# Altium PCB AGC_Calib_Board.PcbDoc (part 2 of 2)
Units mil, origin at the board's own origin, x right, y up, seen from the top; angles counter-clockwise.
Board outline 3200 x 2800 mil, 6 copper layers (Top Layer, InternalPlane1, MidLayer1, MidLayer2, MidLayer3, Bottom Layer), stack 62.3 mil thick; 76 components, 86 nets, 398 pads, 234 vias.
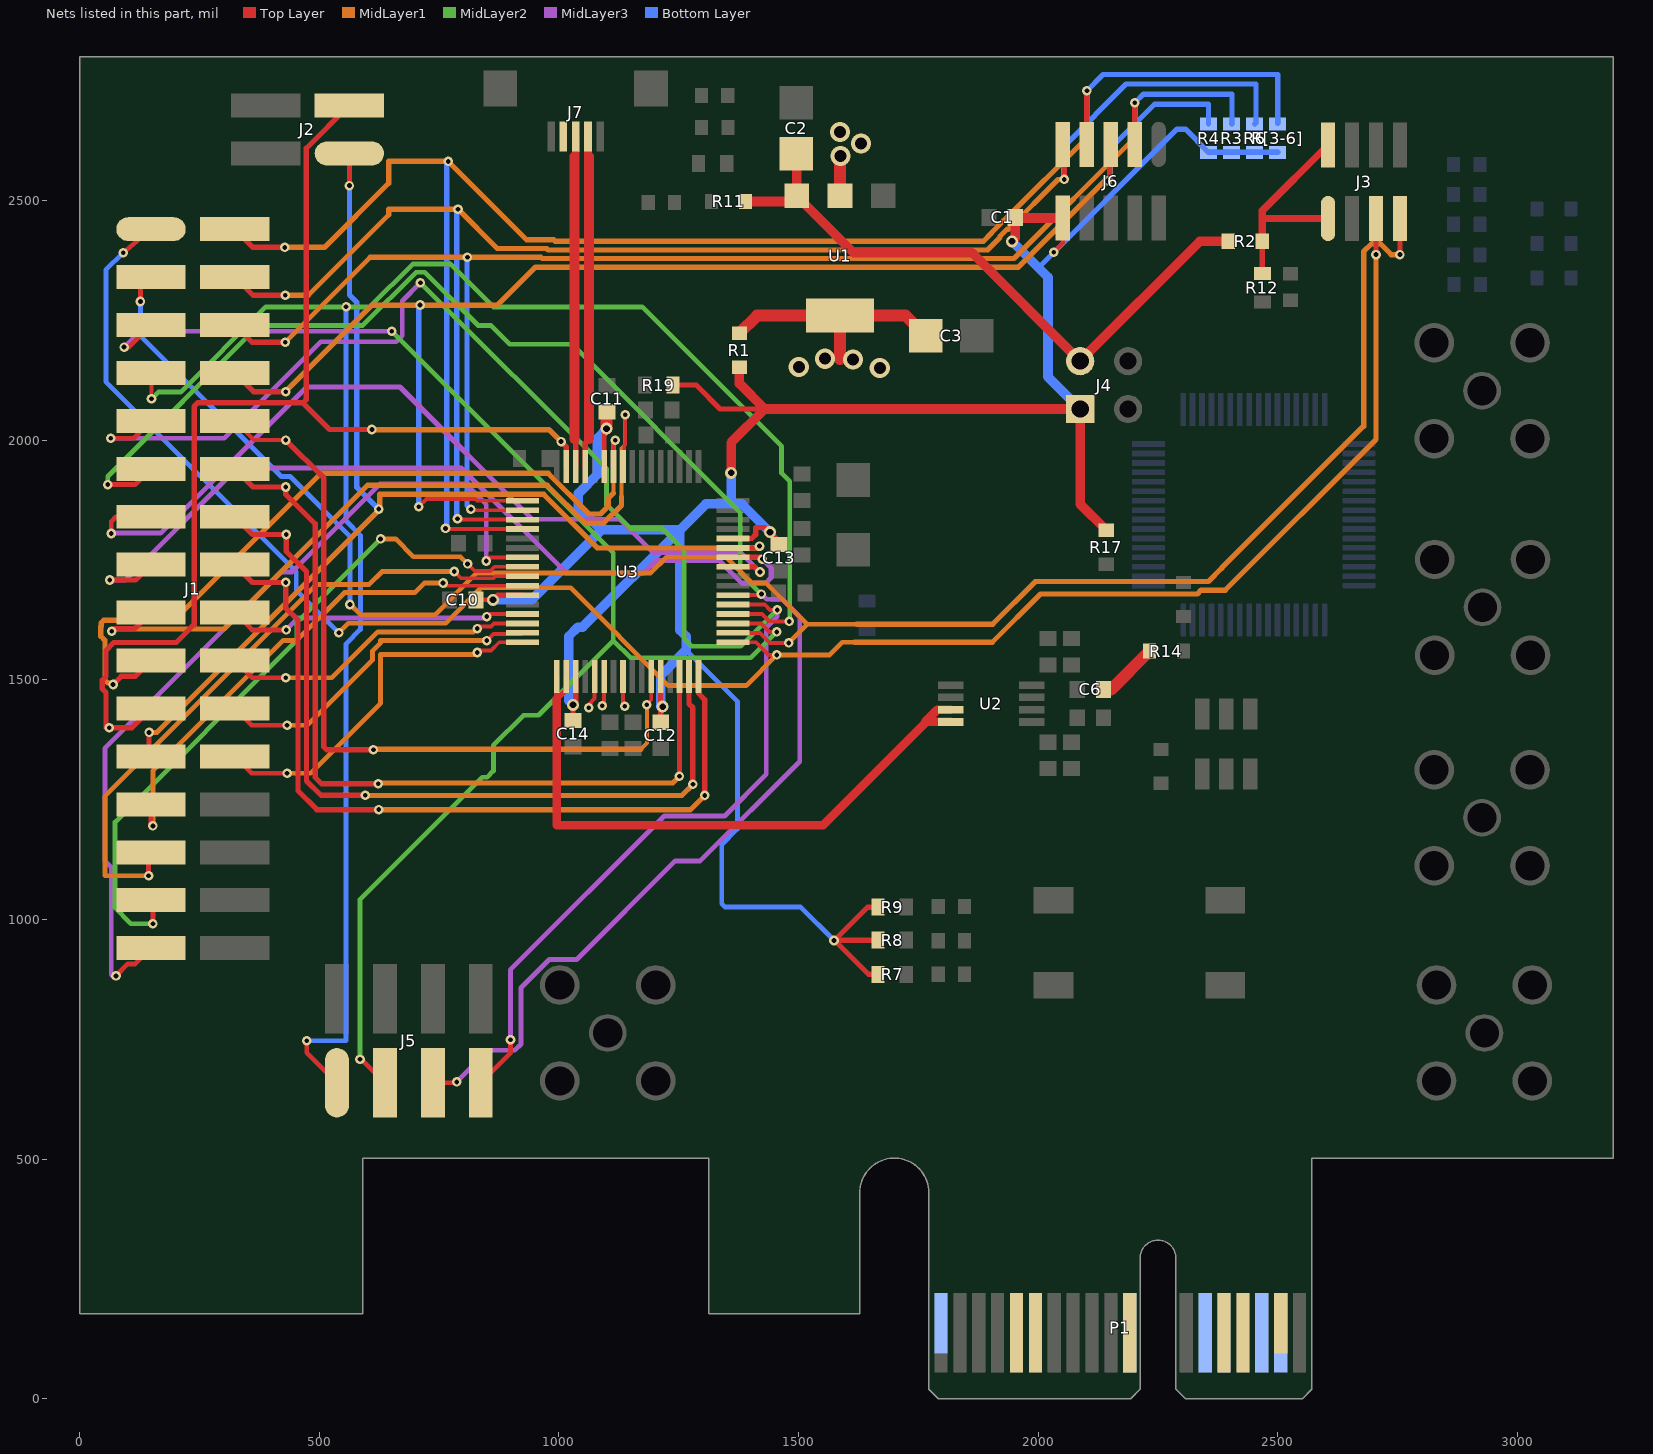
[diagram p6: the nets of this part, all layers, seen from the top]

## Via types
v1: diameter 20, hole 10, Top Layer to Bottom Layer, tented top, 130 vias
v2: diameter 20, hole 10, Top Layer to Bottom Layer, 48 vias
v3: diameter 42, hole 25, Top Layer to Bottom Layer, 29 vias
v4: diameter 25, hole 14, Top Layer to Bottom Layer, 19 vias
v5: diameter 200, hole 125, Top Layer to Bottom Layer, 4 vias
v6: diameter 20, hole 10, Top Layer to Bottom Layer, tented both sides, 3 vias
v7: diameter 25, hole 14, Top Layer to Bottom Layer, tented top, 1 vias

## Nets (pads, with @x,y where several pads share a name; then routed paths per layer and width w, separated by ;. In a path a pad name is that pad's centre, name@x,y a point inside that pad or via, vN(x,y) a via of type N, cw(c..) or ccw(c..) an arc to the next point about the centre after c; other vN are vias at no path point) (continued)
PA0: J1.1 J3.3 U3.17 | length 4149.7
  Top Layer w8: U3.17@1363,1578.09 1411.15,1578.09 1437.51,1551.73 v2(1454.51,1551.73)
  Top Layer w10: v1(91,2391) J1.1@149,2440
  Top Layer w11.1: v2(2704.71,2386.93) J3.3@2704.71,2462.2
  MidLayer1 w10: v1@540,1597 v1(541,1598) 560.72,1617.72 763.5,1617.72 837.5,1691.72 1024.5,1691.72 1228.5,1487.72 1390.5,1487.72 v2(1454.51,1551.73) 1565.14,1551.73 1591.5,1578.09 1617.51,1578.09
  MidLayer1 w11.1: 1617.51,1578.09 1904.09,1578.09 2005,1679 2332,1679 2339.9,1686.9 2390.19,1686.9 2704.71,2001.42 v2(2704.71,2386.93)
  Bottom Layer w10: v1(91,2391) 55,2355 55,2122 55.11,2122 452,1725.11 452,1687 v1(541,1598)
PA1: J1.2 J3.4 U3.18 | length 4000.2
  Top Layer w8: U3.18@1363,1597.78 1419.46,1597.78 1440.51,1576.73 v2(1479.51,1576.73)
  Top Layer w10: v1(127,2289) 127,2318 J1.2@149,2340
  Top Layer w11.1: v2(2754.71,2386.93) J3.4@2754.71,2462.2
  MidLayer1 w10: v1@563,1659 586.28,1635.72 742,1635.72 829,1722.72 1191.5,1722.72 1224.5,1755.72 1349.5,1755.72 1403.5,1701.72 1432.52,1701.72 1518.51,1615.73 ; v2(1479.51,1576.73) 1518.51,1615.73 ; 1621.32,1615.73 1518.51,1615.73
  MidLayer1 w11.1: 1621.32,1615.73 1904.87,1615.73 1994.13,1705 2355,1705 2383,1733 ; 2382.7,1732.82 2679,2029.12 2679,2393.11 2695.37,2409.48 2714.05,2409.48 2736.6,2386.93 v2(2754.71,2386.93)
  Bottom Layer w10: v1(127,2289) 127,2218 421,1924 439.11,1924 564,1799.11 v1(564,1657)
PA2: J1.3 J5.2 U3.19 | length 3151.1
  Top Layer w8: U3.19@1363,1617.46 1421.78,1617.46 1439.51,1599.73 v2(1454.51,1599.73)
  Top Layer w10: v1(93,2194) 103,2194 J1.3@149,2240 ; v1(585,708) 588,708 J5.2@637,659
  MidLayer3 w10: v1(93,2194) 126.11,2227.11 v1(651.11,2227.11)
  MidLayer2 w10: v1@585,707 v1(585,708) 585,1041.33 840.4,1296.73 850.62,1296.73 863.51,1309.62 863.51,1362.84 926.4,1425.73 957.51,1425.73 1113.5,1581.72 ; v1(651.11,2227.11) 1113.5,1764.72 1113.5,1581.72 ; v2(1454.51,1599.73) 1400.5,1545.72 1149.5,1545.72 1113.5,1581.72
PA3: J1.4 J5.1 U3.20 | length 3893.2
  Top Layer w8: J1.4@149,2140 150,2141 v1(150,2086) ; U3.20@1363,1637.15 1424.09,1637.15 1439.51,1621.73 v2(1480.51,1621.73)
  Top Layer w10: v1(474,747) 474,722 J5.1@537,659
  MidLayer2 w10: v1(150,2086) 164,2100 210.96,2100 388.68,2277.72 605.57,2277.72 694.96,2367.11 774.11,2367.11 863.5,2277.72 1173.5,2277.72 1464.5,1986.72 1464.5,1930.72 1481.5,1913.72 1481.5,1622.72 v2(1480.51,1621.73)
  Bottom Layer w10: v1(474,747) 556,747 556,1574.89 586,1604.89 586,1801.15 556,1831.15 v1(556,2278)
PA4: J1.5 J5.4 U3.21 | length 3576.5
  Top Layer w8: U3.21@1363,1656.83 1429.41,1656.83 1440.51,1645.73 v2(1455.51,1645.73)
  Top Layer w10: v1(65,2004) 113,2004 J1.5@149,2040 ; J5.4@837,659 899,721 v1(899,749)
  MidLayer3 w10: v1(65,2004) 301.89,2004 503,2205.11 660.23,2205.11 673.11,2218 673.11,2290.11 v1(711.11,2328.11) ; v1(899,749) 899,895 1219.73,1215.73 1345.62,1215.73 1432.51,1302.62 1432.51,1608.84 1455.51,1631.84 v2(1455.51,1645.73)
  MidLayer2 w10: v1(711.11,2328.11) 1099.5,1939.72 1099.5,1864.72 1148.5,1815.72 1214.5,1815.72 1261.5,1768.72 1261.5,1585.72 1277.5,1569.72 1379.5,1569.72 v2(1455.51,1645.73)
PA5: J1.6 J5.3 U3.22 | length 3586.8
  Top Layer w8: U3.22@1363,1676.52 v1@1420.3,1676.52
  Top Layer w10: v1(59,1907) 116,1907 J1.6@149,1940 ; J5.3@737,659 785,659 v1(787,661)
  Top Layer w11.1: v1@1420.3,1676.52 v1(1422.51,1678.73)
  MidLayer3 w10: v1(787,661) 853,727 908.11,727 921,739.89 921,847.43 ; 921,847 921,857.43 979.91,916.34 1037.34,916.34 1243,1122 1295.11,1122 1502.51,1329.4 1502.51,1630.84 1465.62,1667.73 1433.51,1667.73 v1(1422.51,1678.73)
  MidLayer2 w10: v1(59,1907) 59,1924 374.11,2239.11 591,2239.11 702,2350.11 720.23,2350.11 831.23,2239.11 858.11,2239.11 897.5,2199.72 1027.5,2199.72 1378.5,1848.72 1378.5,1722.74 v1(1422.51,1678.73)
PA6: J1.7 U3.25 | length 1814.2
  Top Layer w10: v1@65,1806 v1(66,1805) 66,1830 76,1840 J1.7@149,1840
  Top Layer w11.1: U3.25@1363,1735.57 1408.67,1735.57 v2(1419.51,1724.73)
  MidLayer3 w10: v1@66,1806 169,1806 473.72,2110.72 668.5,2110.72 944.5,1834.72 1126.5,1834.72 1195.5,1765.72 1378.52,1765.72 v2(1419.51,1724.73)
PA7: J1.8 U3.26 | length 1810.5
  Top Layer w10: v1(63,1708) 117,1708 J1.8@149,1740
  Top Layer w11.1: U3.26@1363,1755.26 1420.98,1755.26 v2(1424.51,1751.73)
  MidLayer3 w10: v1(63,1708) 95.04,1708 328.77,1941.72 796.55,1941.72 1015.55,1722.72 1177.5,1722.72 1203.5,1748.72 1334.5,1748.72 1381.5,1701.72 1431.5,1701.72 1442.5,1712.72 1442.5,1733.74 v2(1424.51,1751.73)
PB0: J1.9 U3.41 | length 1640.6
  Top Layer w8: U3.41@1133.67,1945.22 1136.45,1948 1136.45,1988.97 1138.51,1991.03 v2(1138.51,2052.73)
  Top Layer w11.1: v1(67,1601) 67,1600 74,1607 116,1607 J1.9@149,1640
  MidLayer1 w8: 1130.53,1881.75 1130.53,1983.06 1138.51,1991.03 v2(1138.51,2052.73)
  MidLayer1 w11.1: v1(67,1601) 67,1600 72.9,1605.9 301.01,1605.9 600.84,1905.73 975.51,1905.73 1054.51,1826.73 1093.51,1826.73 1130.51,1863.73 1130.51,1881.73
PB1: J1.10 U3.42 | length 1658.2
  Top Layer w8: U3.42@1113.98,1945.22 v2@1113.98,1996.2
  Top Layer w11.1: v1(70,1490) 87,1507 116,1507 J1.10@149,1540
  MidLayer1 w8: 1113.98,1889.2 v2@1113.98,1996.2
  MidLayer1 w11.1: v1@67,1493 59,1493 53,1499 53,1582.11 44.45,1590.66 44.45,1610.34 45,1610.89 45,1618.21 50.79,1624 197.1,1624 503.83,1930.73 977.51,1930.73 1062.51,1845.73 1086.51,1845.73 1103.51,1862.73 1103.51,1878.73 1113.98,1889.2
  other v2: 1117.51,1999.73
PB2: J1.11 J2.2 U3.47 | length 2458.5
  Top Layer w11.1: J1.11@149,1440 109,1400 55,1400 55,1473.11 47.45,1480.66 47.45,1499.34 55,1506.89 55,1561.19 71.36,1577.55 201.74,1577.55 239.01,1614.82 239.01,2070.2 246.36,2077.55 466.25,2077.55 ; J2.2@563,2698 562.46,2698 472.99,2608.54 472.99,2084.29 466.25,2077.55 ; v1(610,2022) 521.8,2022 466.25,2077.55 ; v2(1004.51,1996.73) 1015.56,1985.68 U3.47@1015.56,1945.22
  MidLayer1 w11.1: v1@610,2021.44 979.51,2021.73 v2(1004.51,1996.73)
  other v1: 62,1400
PB3: J1.12 J2.1 U3.27 | length 2437.3
  Top Layer w11.1: v1(145,1390) 145,1336 J1.12@149,1340 ; v1(563,2531) J2.1@563,2598 ; U3.27@1363,1774.94 1414.72,1774.94 v2(1418.51,1778.73)
  MidLayer1 w10: 1080.3,1774.94 1422.3,1774.94 v2(1418.51,1778.73)
  MidLayer1 w11.1: v1(145,1390) 161.07,1390 626,1854.93 626,1886.73 968.51,1886.73 1080.3,1774.94
  Bottom Layer w11.1: v1(563,2531) 563,2302.89 578.55,2287.34 578.55,1901.45 v1(624,1856)
PB4: J1.13 U3.58 | length 1091.6
  Top Layer w8: v1(758.51,1701.73) 764.04,1696.2 U3.58@924.02,1696.2
  Top Layer w10: v1@149,1199 J1.13@149,1240
  MidLayer1 w10: v1(153,1195) 153,1310 425,1582 453,1582 552.73,1681.73 699.51,1681.73 719.51,1701.73 v1(758.51,1701.73)
PB5: J1.14 U3.57 | length 1380.8
  Top Layer w8: v1(781.51,1725.73) 795.51,1711.73 863.42,1711.73 867.58,1715.89 U3.57@924.02,1715.89
  Top Layer w10: v1(144,1091) 144,1135 J1.14@149,1140
  MidLayer1 w10: v1(144,1091) 53,1091 53,1257.11 494.62,1698.73 604,1698.73 631,1725.73 v1(781.51,1725.73)
PB6: J1.15 U3.56 | length 1477.8
  Top Layer w8: v1(809.51,1741.73) 824.51,1726.73 857.21,1726.73 866.05,1735.57 U3.56@924.02,1735.57
  Top Layer w10: J1.15@149,1040 153,1044 v1(153,991)
  MidLayer2 w10: 72,1026 107,991 v1(153,991) ; 74,1027 74,1203 453,1582 453,1618.72 v1(628,1793.72)
  MidLayer1 w10: v1(628,1793.72) 659.5,1793.72 696.5,1756.72 794.52,1756.72 v1(809.51,1741.73)
PB7: J1.16 U3.55 | length 1824.2
  Top Layer w8: v1(848.51,1747.73) 856.04,1755.26 U3.55@924.02,1755.26
  Top Layer w10: v1(76,882) 101,907 116,907 J1.16@149,940
  MidLayer3 w10: v1(76,882) 69,882 66,885 66,1109.11 53,1122.11 53,1357.11 420.89,1725 443.28,1725 627,1908.72 805.5,1908.72 848.51,1865.72 v1(848.51,1747.73)
PC0: J1.17 J6.4 R[3-6].2 U3.52 | length 3701.4
  Top Layer w8: v2@764.93,1814.31 U3.52@924.02,1814.31
  Top Layer w11: J1.17@324,2440 362,2402 v1(428,2402) ; J6.4@2101.28,2616.81 2101.28,2688.5 2101.51,2688.73 v1(2101.51,2728.73)
  MidLayer1 w11: v1(428,2402) 511,2402 645,2536 645,2581.43 v1(769.21,2581.43) 932.91,2417.73 989.51,2417.73 992.51,2414.73 1885.51,2414.73 1902.51,2431.73 1902.51,2432.54 1927.7,2457.73 1928.51,2457.73 2101.51,2630.73 v1(2101.51,2728.73)
  Bottom Layer w11: v2@766.01,1818.23 766.01,2578.23 v1(769.21,2581.43) ; v1(2101.51,2728.73) 2135.51,2762.73 2499.51,2762.73 R[3-6].2@2499.51,2660.26
  other v2: 763.51,1815.73
PC1: J1.18 J6.5 R6.2 U3.51 | length 3387.5
  Top Layer w8: v2@790.24,1834 U3.51@924.02,1834
  Top Layer w11: J1.18@324,2340 362,2302 v1(429,2302) ; J6.5@2051.28,2616.81 2054.51,2613.57 v2(2054.51,2543.73)
  MidLayer1 w11: v1(429,2302) 477,2302 645,2470 645,2481.73 v2(789.51,2481.73) 871.51,2399.73 974.51,2399.73 977.51,2396.73 1894.51,2396.73 1920.51,2422.73 1920.51,2425.09 1935.16,2439.73 1937.51,2439.73 2041.51,2543.73 v2(2054.51,2543.73)
  Bottom Layer w8: v2@788.21,1836.03 v2(788.51,1835.73)
  Bottom Layer w11: v2@786.71,1837.53 786.71,2478.93 v2(789.51,2481.73) ; v2(2054.51,2543.73) 2054.51,2613.73 2183.51,2742.73 2454.51,2742.73 2454.51,2661.26 R6.2@2451.51,2659.26
PC2: J1.19 J6.2 R3.2 U3.50 | length 3142.2
  Top Layer w8: v2(816.51,1855.73) 818.56,1853.68 U3.50@924.02,1853.68
  Top Layer w11: J1.19@324,2240 360,2204 v1(429,2204) ; J6.2@2201.28,2616.81 2201.28,2687.5 2201.51,2687.73 v1(2201.51,2703.73)
  MidLayer1 w11: v1(429,2204) 606.43,2381.43 v2(809.21,2381.43) 962.81,2381.43 965.51,2378.73 1949.51,2378.73 2201.51,2630.73 v1(2201.51,2703.73)
  Bottom Layer w11: v2@808.51,2381.43 808.51,1863.73 v2(816.51,1855.73) ; v1(2201.51,2703.73) 2219.51,2721.73 2404.51,2721.73 2404.51,2660.26 R3.2@2403.51,2659.26
PC3: J1.20 J6.3 R4.2 U3.49 | length 3106.2
  Top Layer w8: v2(707.51,1860.73) 723.51,1876.73 825.21,1876.73 828.57,1873.37 U3.49@924.02,1873.37
  Top Layer w11: J1.20@324,2140 363,2101 v1(430,2101) ; v2(2144.51,2540.73) 2149.51,2545.73 2149.51,2615.05 J6.3@2151.28,2616.81
  MidLayer1 w11: v1(430,2101) 610.43,2281.43 872.21,2281.43 951.51,2360.73 1958.51,2360.73 2144.51,2546.73 v2(2144.51,2540.73)
  Bottom Layer w11: v2(707.51,1860.73) v2@707.51,2281.73 ; v2(2144.51,2540.73) 2149.51,2545.73 2149.51,2607.73 2242.51,2700.73 2354.51,2700.73 2355.51,2699.73 R4.2@2355.51,2659.26
  other v2: 710.51,2281.73
PC4: J1.21 U3.11 | length 1618.5
  Top Layer w8: J1.21@324,2040 364,2000 v1(430,2000) ; v2@1183.51,1448.92 1192.72,1458.13 U3.11@1192.72,1506.24
  Top Layer w11.1: v1(430,2000) 509.55,1920.45 509.55,1360 515.55,1354 v1(613,1354)
  MidLayer1 w8: 1170.51,1354.73 1183.51,1367.73 v2(1183.51,1447.73)
  MidLayer1 w11.1: v1@613,1354.73 1170.51,1354.73
PC5: J1.22 U3.14 | length 1731.3
  Top Layer w11: J1.22@324,1940 362,1902 v1(430,1902) 430,1887 491.5,1825.5 491.5,1296.46 504.96,1283 v1(623,1283) ; v2@1251.78,1299.05 U3.14@1251.78,1506.24
  MidLayer1 w11: v1@623,1284.73 1237.46,1284.73 v2(1251.46,1298.73)
PC6: J1.23 U3.15 | length 1709.3
  Top Layer w11: J1.23@324,1840 361,1803 v1(431,1803) 431,1768 473.5,1725.5 473.5,1289 503.5,1259 v1(596,1259) ; U3.15@1271.46,1506.24 1271.46,1449.73 1279.46,1441.73 v2@1279.46,1281.78
  MidLayer1 w11: v1@596.46,1258.54 1256.32,1258.54 v2(1279.51,1281.73)
PC7: J1.24 U3.16 | length 1700.6
  Top Layer w11: J1.24@324,1740 361,1703 v1(430,1703) 430,1650 455.5,1624.5 455.5,1268.5 495,1229 v1(624,1229) ; U3.16@1291.15,1506.24 1291.15,1471.73 1304.15,1458.73 v2@1304.15,1257.73
  MidLayer1 w10: v2@1298.51,1252.73 1304.51,1252.73 v2(1304.51,1258.73)
  MidLayer1 w11: v1@625,1228.84 1274.62,1228.84 v2@1298.51,1252.73
PD0: J1.25 U3.61 | length 628.7
  Top Layer w8: v1(849.51,1631.73) 854.93,1637.15 U3.61@924.02,1637.15
  Top Layer w10: J1.25@324,1640 360,1604 v1(431,1604)
  MidLayer3 w10: v1(431,1604) 455.73,1628.73 846.51,1628.73 v1(849.51,1631.73)
PD1: J1.26 U3.62 | length 661.9
  Top Layer w8: v1@833.51,1610.73 858.21,1610.73 864.94,1617.46 U3.62@924.02,1617.46
  Top Layer w10: J1.26@324,1540 360,1504 v1(430,1504) ; v1(829.51,1606.73) v1@833.51,1610.73
  MidLayer1 w10: v1(430,1504) 526.23,1504 621.95,1599.72 822.5,1599.72 v1(829.51,1606.73)
PD2: J1.27 U3.63 | length 708.3
  Top Layer w8: v1(849.51,1581.73) 863.51,1595.73 921.98,1595.73 U3.63@924.02,1597.78
  Top Layer w10: J1.27@324,1440 359,1405 v1(433,1405)
  MidLayer1 w10: v1(433,1405) 475,1405 611,1541 611,1559.77 628,1576.77 628,1581.73 v1(849.51,1581.73)
PD3: J1.28 U3.64 | length 787.2
  Top Layer w8: v1@833.51,1560.73 858.21,1560.73 875.57,1578.09 U3.64@924.02,1578.09
  Top Layer w10: J1.28@324,1340 359,1305 v1(433,1305) ; v1(829.51,1556.73) v1@833.51,1560.73
  MidLayer1 w10: v1(433,1305) 482,1305 628,1451 628,1552.73 825.51,1552.73 v1(829.51,1556.73)
PE0: U3.6 | length 62.1
  Top Layer w8: v2@1094.3,1449.52 U3.6@1094.3,1506.24
  Top Layer w10: v2(1090.51,1445.73) v2@1094.3,1449.52
PE1: U3.5 | length 69.5
  Top Layer w8: v2(1062.51,1441.73) 1062.51,1448.43 1074.61,1460.53 U3.5@1074.61,1506.24
PE3: U2.7 U2.8 U3.1 U3.2 | length 1337.6
  Top Layer w11.1: U3.1@995.87,1506.24 995.87,1460.09 1015.56,1479.78 U3.2@1015.56,1506.24
  Top Layer w17.79: 995.87,1460.09 995.87,1196.73 1551.51,1196.73 1764.39,1409.61 ; U2.8@1817.36,1412.17 1764.23,1412.17 1789.47,1437.41 U2.7@1817.71,1437.41
PE4: U3.8 | length 64.7
  Top Layer w8: U3.8@1133.67,1506.24 1133.67,1446.89 1136.54,1444.02 1136.85,1444.02 v2(1137.51,1444.73)
PER0_N: P1.A17
PER0_P: P1.A16
PERST#: P1.A11
PET0_N: P1.B15
PET0_P: P1.B14
PRSNT1#: P1.A1
PRSNT2#: P1.B17
REFCLK+: P1.A13
REFCLK-: P1.A14
RF_COUPLED_1: C6.2 R14.2 | length 112.9
  Top Layer w25: C6.2@2152.17,1479.73 R14.2@2232,1559.57
SMCLK: P1.B5
SMDAT: P1.B6
USB0D_N: J7.2 U3.45 | length 692.3
  Top Layer w11.1: U3.45@1054.93,1945.22 1054.93,1993.65 1063.01,2001.73
  Top Layer w15.75: J7.2@1060.72,2633.23 1060.72,2594.03 1063.01,2591.73
  Top Layer w20.5: 1063.01,2001.73 1063.01,2591.73
USB0D_P: J7.3 U3.46 | length 690.2
  Top Layer w11.1: 1032.51,2001.73 1035.24,1999 U3.46@1035.24,1945.22
  Top Layer w15.75: 1032.51,2591.73 1035.13,2594.35 J7.3@1035.13,2633.23
  Top Layer w20.5: 1032.51,2001.73 1032.51,2591.73
USBID_1: J7.4
VCC_33: C1.2 C10.2 C11.2 C12.2 C13.2 C14.2 J4.1 J6.10 R1.2 R3.1 R4.1 R6.1 R7.2 R8.2 R9.2 R17.1 R19.2 R[3-6].1 U3.3 U3.12 U3.28 U3.43 U3.59 | length 6296.8
  Top Layer w10: C10.2@827.07,1666.73 v4(862.51,1666.73) 872.3,1676.52 ; v2(2032.5,2391.72) 2051.28,2410.5 J6.10@2051.28,2463.27
  Top Layer w11: U3.43@1094.3,1945.22 v4@1094.3,2017.52 ; R19.2@1238.04,2114.73 1286.51,2114.73 1336.51,2064.73 1429.51,2064.73 ; R7.2@1665.74,885.51 1646.27,885.51 v1@1575.27,956.51 ; R8.2@1665.74,956.51 v1@1575.27,956.51 ; R9.2@1665.74,1025.51 1644.27,1025.51 v1@1575.27,956.51
  Top Layer w11.1: 872.3,1676.52 U3.59@924.02,1676.52 ; C14.2@1029.51,1415.29 v4(1029.51,1447.73) ; v4@1035.24,1453.46 U3.3@1035.24,1506.24 ; v4@1212.41,1443.83 U3.12@1212.41,1506.24 ; C12.2@1212.51,1411.29 1212.51,1443.73 v4(1216.51,1443.73) ; U3.28@1363,1794.63 1402.41,1794.63 1410.51,1802.73 1410.51,1817.73 1430.51,1817.73 v7(1440.51,1807.73) C13.2@1459.51,1788.73
  Top Layer w20: v4(1359.51,1931.73) 1359.51,1994.73 1429.51,2064.73 ; R1.2@1376.51,2151.87 1376.51,2117.73 1429.51,2064.73 ; v4(1945.51,2414.73) 1952.07,2421.29 C1.2@1952.07,2464.73 ; C1.2@1953.54,2463.27 J6.10@2051.28,2463.27 ; R17.1@2142,1812 2087.51,1866.49 J4.1@2087.51,2064.73 1429.51,2064.73
  Top Layer w25: v4(1099.51,2023.73) C11.2@1099.51,2057.17
  Bottom Layer w10: 1265.51,1561.73 1372.51,1454.73 1372.51,1188.69 1339.77,1155.95 1339.77,1032.7 1346.8,1025.67 1504.33,1025.67 v1(1574,956) ; 2003.51,2362.73 v2(2032.5,2391.72)
  Bottom Layer w11: 2003.51,2362.73 2289.51,2648.73 2306.98,2648.73 R4.1@2355.51,2600.2 R3.1@2403.51,2600.2 R6.1@2451.51,2600.2 R[3-6].1@2499.51,2600.2
  Bottom Layer w20: v4(862.51,1666.73) 942.51,1666.73 1088.51,1812.73 ; v4(1029.51,1447.73) 1020.51,1456.73 1020.51,1590.73 1039.51,1609.73 1049.51,1609.73 1252.51,1812.73 ; v4(1099.51,2023.73) 1100.51,2023.73 1080.51,2003.73 1080.51,1928.73 1040.51,1888.73 1040.51,1860.73 1088.51,1812.73 ; v4(1216.51,1443.73) 1212.51,1443.73 1212.51,1508.73 1265.51,1561.73 1265.51,1590.73 1252.51,1603.73 1252.51,1812.73 ; v4@1359.51,1919.73 1359.51,1866.73 ; v7(1440.51,1807.73) 1381.51,1866.73 1359.51,1866.73 ; v4(1945.51,2414.73) 2020.51,2339.73 2020.51,2131.73 J4.1@2087.51,2064.73 ; 1088.51,1812.73 1252.51,1812.73 ; 1252.51,1812.73 1306.51,1866.73 1359.51,1866.73
VCC_33P: C3.2 R1.1 U1.2 U1.4 | length 594.6
  Top Layer w25: R1.1@1376.51,2222.73 1413.51,2259.73 U1.4@1586.51,2259.73 ; 1586.51,2168.73 U1.4@1586.51,2259.73 ; U1.2@1586.51,2509.73 v3@1586.51,2591.73 ; C3.2@1765.36,2217.73 1723.36,2259.73 U1.4@1586.51,2259.73
  other v3: 1669.51,2150.73 1500.51,2152.73 1613.51,2167.73 1555.51,2169.73 1587.51,2592.73 1630.51,2618.73 1586.51,2642.73
VCC_50: C2.2 J4.2 R2.2 R11.2 U1.3 | length 1352.5
  Top Layer w10: U1.3@1483.96,2497.73 1495.96,2497.73 U1.3@1495.96,2509.73
  Top Layer w20: R11.2@1390.04,2497.73 U1.3@1483.96,2497.73 ; C2.2@1495.96,2597.13 U1.3@1495.96,2509.73 1614.96,2390.73 1861.51,2390.73 J4.2@2087.51,2164.73 2337.51,2414.73 R2.2@2396.65,2414.73
VCC_50_AUX_1: J3.1 J3.5 R2.1 R12.2 | length 462
  Top Layer w11: R12.2@2467.51,2347.26 R2.1@2467.51,2414.73
  Top Layer w15: R2.1@2467.51,2414.73 2467.51,2478.55 J3.5@2604.71,2615.75 ; 2468.04,2462.2 J3.1@2604.71,2462.2
WAKE#: P1.B11
pads on no net: J6.7 P1.B12 SW1.2 SW1.3 T1.5 TEST1.1 TEST1.2 TEST1.3 TEST1.4 TEST1.5 TEST1.6 TEST1.7 TEST1.8 TEST1.9 TEST1.10 TEST1.11 TEST1.12 TEST1.13 TEST1.14 TEST1.15 TEST1.16 TEST1.17 TEST1.18 TEST1.19 TEST1.20 TEST1.21 TEST1.22 TEST1.23 TEST1.24 TEST1.25 TEST1.26 TEST1.27 TEST1.28 TEST1.29 TEST1.30 TEST1.31 TEST1.32 TEST1.33 TEST1.34 TEST1.35 TEST1.36 TEST1.37 TEST1.38 TEST1.39 TEST1.40 TEST1.41 TEST1.42 TEST1.43 TEST1.44 TEST1.45 TEST1.46 TEST1.47 TEST1.48 TEST1.49 TEST1.50 TEST1.51 TEST1.52 TEST1.53 TEST1.54 TEST1.55 TEST1.56 TEST1.57 TEST1.58 TEST1.59 TEST1.60 TEST1.61 TEST1.62 TEST1.63 TEST1.64 TEST7.1 TEST7.2 TEST8.1 TEST8.2 TEST9.1 TEST9.2 TEST10.1 TEST10.2 TEST11.1 TEST11.2 TEST12.1 TEST12.2 TEST13.1 TEST13.2 TEST14.1 TEST14.2 U3.33 U3.35

## Polygon pours and split planes (outlines as drawn)
VCC_33P on Bottom Layer "Top Layer-No Net" (hatched 90Degree grid 20 track 10, pour order 10): 1495.51,2693.73 1679.51,2693.73 1685.51,2687.73 1684.51,2686.73 1684.51,2596.73 1684.51,2583.73 1649.51,2548.73 1618.51,2517.73 1618.51,2486.73 1548.51,2486.73 1547.51,2487.73 1532.51,2502.73 1532.51,2548.73 1530.51,2548.73 1495.51,2583.73 1495.51,2693.73
VCC_33P on Bottom Layer "Top Layer-No Net" (hatched 90Degree grid 20 track 10, pour order 12): 1429.51,2557.73 1429.51,2110.73 1427.51,2108.73 1730.51,2108.73 1730.51,2469.73 1727.51,2472.73 1621.51,2472.73 1621.51,2556.73 1622.51,2557.73
GND on Top Layer "Top Layer-No Net" (solid, pour order 33): 907.51,2132.73 912.51,2137.73 912.51,2620.73 1157.51,2620.73 1157.51,2134.73
GND on Top Layer "Top Layer-No Net" (solid, pour order 31): 647.51,2192.73 1358.28,2192.73 1493.11,2077.47 1814,2077.47 1814,1204.56 1726.2,1129.51 1711.57,1117 716.5,1117 713.36,1117 647.51,1173.29
GND on InternalPlane1 (split plane): 3179.9,522.1 2570.87,522.07 2568.93,521.87 2566.95,521.68 2566.94,521.68 2565.25,521.17 2563.18,520.54 2563.17,520.54 2562.06,519.94 2559.7,518.68 2558.75,517.9 2556.66,516.18 2556.65,516.18 2554.93,514.08 2554.16,513.13 2552.89,510.77 2552.3,509.66 2551.67,507.58 2551.16,505.89 2550.96,503.9 2550.77,501.97 2550.77,28.01 2542.86,20.1 2315.41,20.1 2307.5,28.01 2307.5,293.31 2307.48,293.46 2307.13,299.74 2306.05,306.1 2304.27,312.3 2301.8,318.25 2298.68,323.89 2294.95,329.15 2290.65,333.96 2285.85,338.26 2280.59,341.99 2274.94,345.11 2268.99,347.57 2262.79,349.36 2256.44,350.44 2250,350.8 2243.56,350.44 2237.21,349.36 2231.01,347.57 2225.06,345.11 2219.41,341.99 2214.15,338.26 2209.35,333.96 2205.05,329.15 2201.32,323.89 2198.2,318.25 2195.73,312.3 2193.95,306.1 2192.87,299.74 2192.52,293.46 2192.5,293.31 2192.5,28.01 2184.59,20.1 1799.66,20.1 1791.75,28.01 1791.75,430.12 1791.73,430.29 1791.39,438.13 1790.34,446.08 1788.61,453.91 1786.2,461.56 1783.13,468.97 1779.42,476.09 1775.11,482.85 1770.23,489.21 1764.81,495.13 1758.9,500.55 1752.54,505.43 1745.77,509.74 1738.66,513.44 1731.25,516.51 1723.6,518.92 1715.77,520.66 1707.82,521.71 1699.8,522.06 1691.79,521.71 1683.84,520.66 1676.01,518.92 1668.36,516.51 1660.95,513.44 1653.83,509.74 1647.07,505.43 1640.71,500.55 1634.79,495.13 1629.37,489.21 1624.49,482.85 1620.18,476.09 1616.48,468.97 1613.41,461.56 1611,453.91 1609.26,446.08 1608.22,438.13 1607.87,430.29 1607.86,430.12 1607.86,197.26 1333.09,197.26 1333.09,501.97 1332.7,505.89 1331.56,509.66 1329.7,513.13 1327.2,516.18 1324.16,518.68 1320.68,520.54 1316.91,521.68 1312.99,522.07 590.55,522.07 586.63,521.68 582.86,520.54 579.39,518.68 576.34,516.18 573.84,513.13 571.98,509.66 570.84,505.89 570.45,501.97 570.45,197.26 20.1,197.26 20.1,2779.9 3179.9,2779.9

## Keep-outs
Top Layer:
  rectangle: 2570.87,501.97 3200,541.34
  region: 0,175.18 590.55,175.18 ccw(c590.55,177.17) 592.53,177.17 592.53,499.99 1311.01,499.99 1311.01,312.99 ccw(c1312.99,312.99) 1312.99,311.01 1627.95,311.01 ccw(c1627.95,312.99) 1629.94,312.99 ccw(c1627.95,312.99) 1629.94,313.01 1629.94,430.12 cw(c1699.8,430.12) 1769.67,430.12 ccw(c1771.65,430.12) 1773.64,430.12 1773.64,541.34 ccw(c1771.65,541.34) 1771.65,543.32 0,543.32 ccw(c0,541.34) -1.98,541.34 -1.98,177.17 ccw(c0,177.17)
Bottom Layer:
  rectangle: 2570.87,501.97 3183,541.34
  region: 0,175.18 590.55,175.18 ccw(c590.55,177.17) 592.53,177.17 592.53,499.99 1311.01,499.99 1311.01,312.99 ccw(c1312.99,312.99) 1312.99,311.01 1627.95,311.01 ccw(c1627.95,312.99) 1629.94,312.99 ccw(c1627.95,312.99) 1629.94,313.01 1629.94,430.12 cw(c1699.8,430.12) 1769.67,430.12 ccw(c1771.65,430.12) 1773.64,430.12 1773.64,541.34 ccw(c1771.65,541.34) 1771.65,543.32 0,543.32 ccw(c0,541.34) -1.98,541.34 -1.98,177.17 ccw(c0,177.17)
TopSolder:
  rectangle: 1312.99,177.17 1627.95,312.99
BottomSolder:
  rectangle: 1312.99,177.17 1627.95,312.99
KeepOutLayer:
  rectangle: 1312.99,177.17 1627.95,312.99

## Other copper
Top Layer:
  rectangle net GND: 1985.23,1257.17 2105.23,1299.17
  rectangle net GND: 2282.51,1343.73 2487.51,1388.73
  rectangle net GND: 1985.23,1601.17 2105.23,1641.17
  region net GND: 1539.51,1944.73 1539.51,1977.73 1475.51,1977.73 1475.51,1944.73
  region net GND: 1540.51,1711.73 1540.51,1744.73 1476.51,1744.73 1476.51,1711.73
  rectangle net GND: 953.51,2464.73 1004.51,2566.73
  rectangle net GND: 1727.51,2485.73 1878.51,2604.73
  rectangle net VCC_33P: 1540.51,2558.73 1665.51,2679.73
  rectangle net VCC_33P: 1470.51,2113.73 1704.51,2202.73
  pour cut-out: 914.51,1989.73 967.51,1988.73 968.51,1989.73 968.51,1936.73 919.51,1936.73 918.51,1937.73
Bottom Layer:
  text "Power Supply Options" at 2703,1071 h70
  text "A. R2 - JTAG 5V PWR" at 2708,956 h50
  text "A. R11 - USB 5V PWR" at 2711,851 h50
  text "B. R1 - REG 3.3V PWR (REQ 5V)" at 2713,744 h50

## Silkscreen, mask and mechanical layers (free items; w line width, h text height)
TopOverlay:
  text "TDI" at 2212.51,2702.73 h20 r90
  text "RST" at 2260.51,2702.73 h20 r90
  text "TCK" at 2111.51,2700.73 h20 r90
  text "TMS" at 2060.51,2698.73 h20 r90
  text "TDO" at 2161.51,2698.73 h20 r90
  text "GND" at 2713.51,2689.73 h20 r90
  text "GND" at 2764.51,2689.73 h20 r90
  text "AUX5V" at 2612.51,2688.73 h20 r90
  text "DBG1" at 2665.51,2688.73 h20 r90
  text "SCL" at 660.51,2687.73 h20
  text "SDA" at 661.51,2585.73 h20
  text "PA0" at 425.51,2430.73 h20
  text "PC0" at 512.51,2429.73 h20
  text "NC" at 2210.51,2353.73 h20 r90
  text "GND" at 2110.51,2336.73 h20 r90
  text "GND" at 2162.51,2335.73 h20 r90
  text "GND" at 2263.51,2334.73 h20 r90
  text "PC1" at 515.51,2332.73 h20
  text "PA1" at 430.51,2330.73 h20
  text "DBG2" at 2665.51,2314.73 h20 r90
  text "U0Rx" at 2712.51,2313.73 h20 r90
  text "U0Tx" at 2761.51,2312.73 h20 r90
  text "AUX5V" at 2615.51,2294.73 h20 r90
  text "VSENSE" at 2059.51,2277.73 h20 r90
  text "PC2" at 512.51,2231.73 h20
  text "PA2" at 428.51,2230.73 h20
  text "PC3" at 510.51,2130.73 h20
  text "I2C" at 2857,2130 h30
  text "PA3" at 429.51,2126.73 h20
  text "PC4" at 509.51,2033.73 h20
  text "PA4" at 431.51,2032.73 h20
  text "Aux Pwr" at 1817,1984 h30
  text "PA5" at 433.51,1931.73 h20
  text "PC5" at 504.51,1931.73 h20
  text "UHF Coupled" at 2769,1888 h30
  text "PC6" at 504.51,1830.73 h20
  text "PA6" at 433.51,1829.73 h20
  text "PA7" at 431.51,1726.73 h20
  text "PC7" at 506.51,1726.73 h20
  text "PD0" at 504.51,1631.73 h20
  text "PB0" at 429.51,1628.73 h20
  text "PB1" at 435.51,1530.73 h20
  text "PD1" at 504.51,1530.73 h20
  text "PB2" at 430.51,1430.73 h20
  text "PD2" at 503.51,1430.73 h20
  text "UHF In" at 2848,1429 h30
  text "PB3" at 428.51,1330.73 h20
  text "PD3" at 504.51,1330.73 h20
  text "PB4" at 429.51,1228.73 h20
  text "GND" at 506.51,1227.73 h20
  text "PB5" at 427.51,1129.73 h20
  text "GND" at 502.51,1128.73 h20
  text "3.3V Pwr Good" at 1514,1071 h30
  text "PB6" at 429.51,1028.73 h20
  text "GND" at 505.51,1027.73 h20
  text "UHF Out" at 2835,998 h30
  text "GND" at 710.51,936.73 h20
  text "GND" at 510,936 h20
  text "GND" at 609.51,935.73 h20
  text "GND" at 812.51,933.73 h20
  text "PB7" at 429.51,932.73 h20
  text "GPIO" at 194,830 h30
  text "AGC Calibration Board" at 1622,702 h30
  text "v 1.0" at 1623,640 h30
  text "SSI" at 389,596 h30
  text "me@ryaneguerra.com" at 1623,575 h30
  text "RF Test" at 1300,559 h30
  text "RF Test" at 2843,549 h30
  text "Fss" at 510,542 h20
  text "Tx" at 720,542 h20
  text "Clk" at 611,540 h20
  text "Rx" at 821,540 h20
TopSolder:
  rectangle: 1722,1331 1770,1503
  rectangle: 1044.51,2695.73 1120.51,2771.73
  rectangle: 950.51,2696.73 1025.51,2770.73
  rectangle: 1112,2599 1202,2668
  rectangle: 867,2598 958,2669
  rectangle: 950,1378 1005,1452
PCI-SIG Outline:
  the board outline again, w3.94

## Dimensions
0,2800 to 3200,2800 on PCI-SIG Dimensions
0,0 to 0,2800 on PCI-SIG Dimensions
0,177.17 to 0,2800 on PCI-SIG Dimensions

## Text inside footprints (layer, text, board x,y; h text height)
J4: TopOverlay "+3.3V" at 2037.51,1981.73 h20; TopOverlay "+5.0V" at 2035.51,2227.73 h20; TopOverlay "GND" at 2163.51,2228.73 h20; TopOverlay "GND" at 2166.51,1980.73 h20